# Altium PCB Marcelo-v1.PcbDoc
Units mil, origin at the board's own origin, x right, y up, seen from the top; angles counter-clockwise.
Board outline 433.07 x 434.05 mil, 4 copper layers (Top Layer, Mid-Layer 1, Mid-Layer 2, Bottom Layer); 36 components, 30 nets, 159 pads, 24 vias.
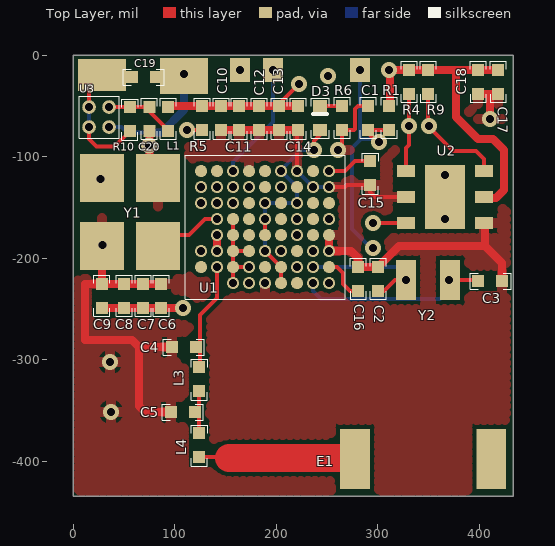
[diagram p0: Top Layer view]
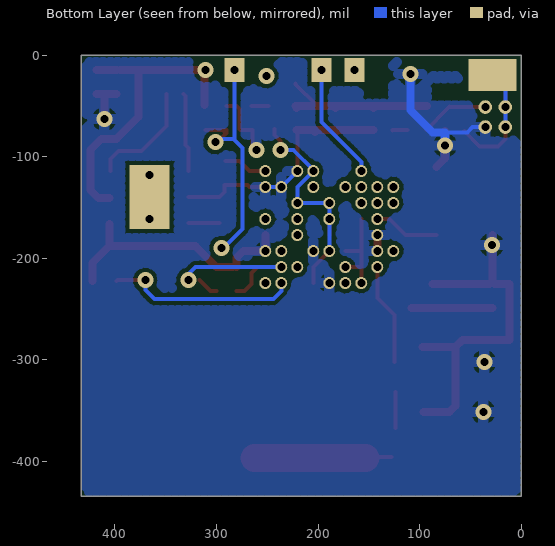
[diagram p1: Bottom Layer view, seen from below]
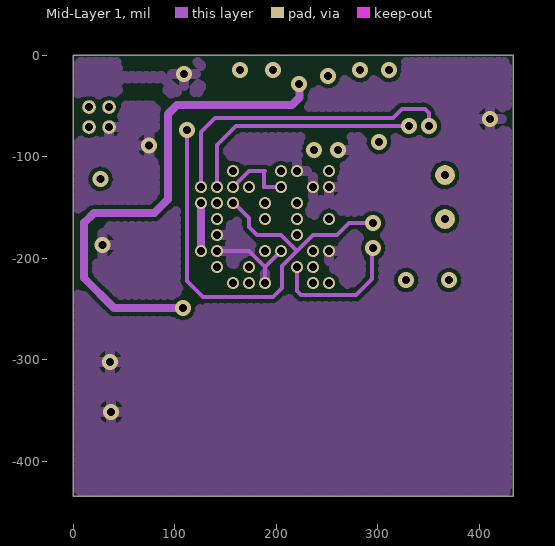
[diagram p2: Mid-Layer 1]
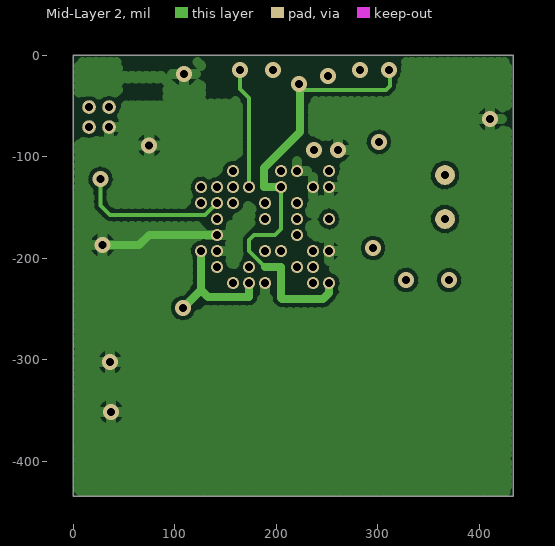
[diagram p3: Mid-Layer 2]

## Layer stack, top to bottom
Top Solder: solder mask 0.4, Solder Resist, Dk 3.5
Top Layer: signal copper 1.4
Dielectric1: prepreg 12.6, FR-4, Dk 4.8
Mid-Layer 1: signal copper 1.4
Dielectric2: core 12.6, FR-4, Dk 4.8
Mid-Layer 2: signal copper 1.4
Dielectric3: prepreg 12.6, FR-4, Dk 4.8
Bottom Layer: signal copper 1.4
Bottom Solder: solder mask 0.4, Solder Resist, Dk 3.5

## Board outline
0,-434.06 433.07,-434.06 433.07,0 0,0

## Design rules (kind name [scope] priority, off if disabled: settings)
Clearance "pour clearance" [(InNet('GND'))] p1: gap=3.94 ignorepadtopadclearanceinfootprint=FALSE except(0: Arc-Hole Track-Hole SMDPad-Hole THPad-Hole Via-Hole Fill-Hole Poly-Hole Region-Hole Text-Hole)
Clearance [All] p2: gap=3 ignorepadtopadclearanceinfootprint=FALSE except(0: Arc-Hole Track-Hole SMDPad-Hole THPad-Hole Via-Hole Fill-Hole Poly-Hole Region-Hole Text-Hole)
ComponentClearance [All] p1: gap=3.94 collisioncheckmode=3 verticalgap=10 showdistances=FALSE
FabricationTestPointUsage TestPointUsage [All] p1: valid=0 allowmultiple=FALSE
FabricationTestpoint Testpoint [All] p1: side=3 testpointundercomponent=TRUE minsize=40 maxsize=100 preferedsize=60 minholesize=0 maxholesize=40 preferedholesize=32 testpointgrid=1 allowsidetop=TRUE allowsidebottom=TRUE usegrid=TRUE gridtolerance=0.01
HoleSize [All] p1: absolutevalues=TRUE maxlimit=100 minlimit=7.87 maxpercent=80.000 minpercent=20.000
HoleToHoleClearance [All] p1: gap=3.94 allowstackedmicrovias=TRUE
MinimumSolderMaskSliver [All] p1: minsoldermaskwidth=0.39
PolygonConnect [All] p1: connectstyle=Relief reliefconductorwidth=10 reliefentries=4 polygonreliefangle="90 Angle" airgapwidth=10
RoutingVias [All] p1: holewidth=11.81 width=19.68 viastyle="Through Hole" minholewidth=11.81 minwidth=19.68 maxholewidth=28 maxwidth=50
ShortCircuit [All] p1: allowed=TRUE
SilkToSilkClearance [All] p1: silktosilkclearance=0
SilkToSolderMaskClearance SilkscreenOverComponentPads [IsPad] p1: minsilkscreentomaskgap=0 clearancetoexposedcopper=TRUE
SolderMaskExpansion [All] p1: expansion=0.39
Width [All] p1: maxlimit=39.37 minlimit=3.94 preferedwidth=3.94
21 further rules are at their usual default settings.

## Components (designator, comment, footprint, x,y, rotation, side; value= is the part's Value field where it differs from the comment)
C1 "100pF" 0201 290.35,-73.82 r90 top
C2 "56pF" 0201 300.2,-232.28 r90 top
C3 "27pF" 0201 398.62,-222.44 r0 top
C4 "0.2pF" 0201 121.06,-287.4 r180 top
C5 "1.5pF" 0201 120.08,-351.38 r180 top
C6 "0,1uF" 0201 86.61,-249.02 r90 top
C7 "0.1uF" 0201 68.9,-249.02 r90 top
C8 "0.1uF" 0201 50.2,-249.02 r90 top
C9 "1 .0uF" 0201 28.5,-249.02 r90 top
C10 "0.1uF" 0201 145.67,-50.2 r270 top
C11 "0.1uF" 0201 163.39,-50.2 r270 top
C12 "1.0uF" 0201 183.07,-50.2 r270 top
C13 "1uF" 0201 202.76,-50.2 r270 top
C14 "0.1uF" 0201 221.45,-50.2 r270 top
C15 "1uF" 0201 292.32,-104.33 r270 top
C16 "1uF" 0201 280.51,-232.28 r90 top
C17 "1uF" 0201 418.31,-38.39 r90 top
C18 "0.1uF" 0201 398.62,-38.39 r90 top
C19 "1 uF" 0201 81.69,-21.65 r180 top
C20 "1 uF" 0201 75.09,-74.82 r90 top
D3 "LED1" 0402 243.11,-73.82 r90 top
E1 "Antenna" ANTENA-YSK 277.56,-397.64 r0 top
L1 "Inductor Iron" 0201 93.5,-74.88 r90 top
L3 "1.8nH" 0201 124.02,-307.09 r270 top
L4 "Inductor" 0201 124.02,-372.05 r270 top
R1 "Res1" 0201 311.02,-73.82 r90 top
R4 "Res1" 0201 330.71,-38.39 r90 top
R5 "Res1" 0201 126.97,-50.2 r270 top
R6 "Res1" 0201 264.76,-73.82 r90 top
R9 "Res1" 0201 349.41,-38.39 r90 top
R10 "Res1" 0201 56,-51.18 r270 top
U1 "CYBL10X6X" WLCSP-68 251.97,-114.17 r270 top
U2 "TMP116" DRV0006A 327.76,-114.17 r0 top locked
U3 "ADP172" ADP172 25.59,-61.02 r0 top
Y1 "FA-20H" FA-20H 28.54,-121.24 r270 top
Y2 "32.768KHz" ABS05 327.76,-221.46 r0 top

## Footprints (in the part's own frame and the unit in brackets; to place one, negate y for a bottom-side part, rotate by r counter-clockwise, add the part's x,y. Pads: shape width x height; smd on the part's side, far side on the other; paste and mask are expansions set on the pad)
0201 [mm]
  rect 0.3x0.3 smd paste+0 mask+0.015: 1(0,0) 2(0.6,0)
  silkscreen extent -0.2,-0.2 0.82,0.2
0402 [mm]
  rect 0.3x0.35 smd paste+0 mask+0.015: 1(0,0) 2(0.6,0)
  silkscreen extent -0.2,-0.23 0.8,0.23
ABS05 [mm] "CRYSTAL"
  rect 0.5x1 smd mask+0.1: 1(0,0) 2(1.102,0)
ADP172 [mm]
  round 0.34 hole 0.2 paste+0.01 mask+0.01: A1(-0.25,0.25) A2(0.25,0.25) B1(-0.25,-0.25) B2(0.25,-0.25)
  silkscreen extent -0.5,-0.53 0.5,0.53
ANTENA-YSK [mm]
  rect 0.74x1.5 smd mask+0.03: 1(0,0) 2(3.406,0)
DRV0006A [mm]
  rect 0.45x0.3 smd paste+0.07 mask+0.07: 1(0,0) 2(0,-0.65) 3(0,-1.3) 4(1.95,-1.3) 5(1.95,-0.65) 6(1.95,0)
  rect 1x1.6 smd: 7(0.975,-0.65)
  rect 1x1.6 smd far side: 7(0.975,-0.65)
  round 0.5 hole 0.2: ""(0.975,-1.2)
  round 0.5 hole 0.2 paste+0 mask+0: ""(0.975,-0.1)
FA-20H [mm] "CRYSTAL"
  rect 1.2x1.1 smd mask+0.05: 1(0,0) 2(1.7,0) 4(0,1.4)
  rect 1.2x1.1 smd paste+0 mask+0.05: 3(1.7,1.4)
WLCSP-68 [mm]
  round 0.3 hole 0.2 paste+0.01 mask+0.01: A1(0,0) A2(0.4,0) A4(1.2,0) A6(2,0) A8(2.8,0) B2(0.4,-0.4) B6(2,-0.4) B7(2.4,-0.4) B8(2.8,-0.4) C1(0,-0.8) C3(0.8,-0.8) C4(1.2,-0.8) C5(1.6,-0.8) C7(2.4,-0.8) D1(0,-1.2) D2(0.4,-1.2) D6(2,-1.2) E3(0.8,-1.6) E4(1.2,-1.6) E6(2,-1.6) E8(2.8,-1.6) F2(0.4,-2) F7(2.4,-2) F8(2.8,-2) G1(0,-2.4) G2(0.4,-2.4) G3(0.8,-2.4) G8(2.8,-2.4) H2(0.4,-2.8) H3(0.8,-2.8) H4(1.2,-2.8) H5(1.6,-2.8) H6(2,-2.8) H7(2.4,-2.8) J2(0.4,-3.2) J3(0.8,-3.2) J6(2,-3.2)
  round 0.3 smd paste+0.01 mask+0.01: A3(0.8,0) A5(1.6,0) A7(2.4,0) B1(0,-0.4) B3(0.8,-0.4) B4(1.2,-0.4) B5(1.6,-0.4) C2(0.4,-0.8) C6(2,-0.8) C8(2.8,-0.8) D3(0.8,-1.2) D4(1.2,-1.2) D5(1.6,-1.2) D7(2.4,-1.2) D8(2.8,-1.2) E1(0,-1.6) E2(0.4,-1.6) E5(1.6,-1.6) E7(2.4,-1.6) F1(0,-2) F3(0.8,-2) F4(1.2,-2) F5(1.6,-2) F6(2,-2) G4(1.2,-2.4) G5(1.6,-2.4) G6(2,-2.4) G7(2.4,-2.4) H1(0,-2.8) J1(0,-3.2) J7(2.4,-3.2)
  silkscreen extent -0.4,-3.6 3.2,0.4

## Free pads (board coordinates)
  rect 47.24x31.5 smd far side: 0(28.54,-19.68)
  rect 47.24x31.5 smd: 0(28.54,-19.69)
  rect 47.24x35.43 smd: 0(109.25,-20.67)
  rect 19.68x23.62 smd: 0(164.37,-14.76) 0(196.85,-14.76) 0(282.48,-14.76)
  rect 19.68x23.62 smd far side: 0(164.37,-14.76) 0(196.85,-14.76) 0(282.48,-14.76)

## Via types
v1: diameter 15.75, hole 7.87, Top Layer to Bottom Layer, 17 vias
v2: diameter 15.75, hole 7.87, Top Layer to Mid-Layer 1, 4 vias
v3: diameter 15.75, hole 7.87, Top Layer to Mid-Layer 2, 3 vias

## Nets (pads, with @x,y where several pads share a name; then routed paths per layer and width w, separated by ;. In a path a pad name is that pad's centre, name@x,y a point inside that pad or via, vN(x,y) a via of type N, cw(c..) or ccw(c..) an arc to the next point about the centre after c; other vN are vias at no path point)
GND: C1.2 C2.2 C3.2 C4.2 C5.2 C6.2 C7.2 C8.2 C9.2 C10.2 C11.2 C12.2 C13.2 C14.2 C15.2 C16.2 C17.1 C18.1 C19.1 C20.1 pad.0@109.25,-20.67 R6.1 U1.A2 U1.A5 U1.A6 U1.B2 U1.C1 U1.D6 U1.E8 U1.F1 U1.H5 U1.H6 U2.2 U2.4 U3.B2 Y1.2 Y1.4 | length 1355.4
  Top Layer w3.94: U1.C1 C14.2@220.47,-74.8 ; U1.A2 267.72,-129.92 269.68,-127.95 C15.2 292.32,-134.84 297.24,-139.76 U2.2 ; v1(260.83,-93.5) 264.76,-89.57 R6.1 276.57,-73.82 277.56,-72.83 277.56,-53.15 280.51,-50.2 C1.2
  Top Layer w7.87: C9.2@26.5,-225.39 11.73,-225.39 11.73,-280.4 57.96,-280.4 64.96,-287.4 ; C9.2@28.54,-222.44 Y1.2 Y1.2@28.54,-177.16 ; C9.2@31.5,-225.39 C6.2 C6.2@87.6,-225.39 ; C20.1 75.09,-101.66 Y1.4@83.66,-110.24 ; C5.2 70.87,-351.38 64.96,-345.47 64.96,-287.4 ; C4.2 64.96,-287.4 ; U1.H6 U1.H5 ; C10.2 C12.2 C12.2@185.04,-73.82 ; C12.2@183.07,-75.79 C12.2@185.04,-73.82 ; C13.2@202.96,-75.77 C13.2@201.01,-73.82 ; C14.2 C13.2 C13.2@201.01,-73.82 ; U1.A5 U1.A6 273.62,-192.91 280.51,-199.8 C16.2 ; C16.2@284.45,-208.66 C2.2 320.87,-187.99 405.51,-187.99 ; C18.1 410.45,-38.39 ; U2.4@405.51,-166.34 405.51,-187.99 ; v1(410.43,-62.99) 410.43,-39.35 ; 411.42,-39.35 410.45,-38.39 ; C17.1 410.45,-38.39 ; C3.2 422.24,-204.72 405.51,-187.99 ; C12.2@185.04,-73.82 C13.2@201.01,-73.82
  Mid-Layer 1 w3.94: U1.H6 173.23,-192.91 188.98,-208.66 ; U1.E8 188.98,-208.66 ; U1.D6 188.98,-208.66
  Mid-Layer 2 w7.87: v1(29,-187) 64.92,-187.08 75.03,-177.02 U1.H5
  Bottom Layer w3.94: U3.B2 47.87,-70.87 53,-76 75,-76 ; U1.C1 U1.B2 U1.A2
  Bottom Layer w7.87: v1(75,-89) 75,-76 87.39,-76 109.25,-54.13 v1(109.25,-18.7) v1@109.25,-17.72
  other v1: 37.4,-351.38 36.42,-302.17
NetC2_1: C2.1 U1.B7 Y2.1 | length 122.5
  Top Layer w3.94: C2.1 306.1,-232.28 316.93,-221.46
  Bottom Layer w3.94: U1.B7 320.87,-208.66 327.76,-215.55 v1(327.76,-221.46) v1@327.76,-222.44
NetC3_1: C3.1 U1.B8 Y2.2 | length 185.4
  Top Layer w3.94: Y2.2 397.64,-221.46 C3.1
  Bottom Layer w3.94: U1.B8 236.22,-232.28 244.09,-240.16 351.38,-240.16 ; 352.36,-240.16 361.22,-240.16 370.08,-231.3 v1(370.08,-221.46)
NetC4_1: C4.1 L3.1 U1.H7 | length 100.4
  Top Layer w3.94: L3.1@125,-302.17 125,-287.4 125,-255.91 141.73,-239.17 U1.H7
NetC5_1: C5.1 L3.2 L4.1 | length 35.4
  Top Layer w3.94: L4.1@124.02,-367.13 124.02,-351.38 L3.2@124.02,-331.69
NetC20_2: C20.2 L1.1 R10.1 U3.A2 | length 67.7
  Top Layer w3.94: U3.A2 R10.1 69.8,-51.18 70.45,-50.83 72.95,-53.33 L1.1@93.5,-73.88
NetD3_2: D3.2 R6.2 | length 16.7
  Top Layer w3.94: D3.2@249.02,-50.2 R6.2 R6.2@265.75,-50.2
NetE1_1: E1.1 L4.2 | length 132.9
  Top Layer w3.94: L4.2@127.95,-395.67 151.57,-395.67
  Top Layer w27.56: 153.54,-396.65 262.8,-396.65
NetU1_F6: U1.F6 U1.F7 U1.G4 U1.G5 U1.G6 U1.G7 U1.G8 | length 94.5
  Top Layer w3.94: U1.G8 U1.G7 ; U1.G4 U1.G5 U1.G6 ; U1.F7 U1.G7 ; U1.F6 U1.G6 ; U1.G7 U1.G6
NetU1_H3: U1.H3 Y1.1 | length 149.1
  Mid-Layer 2 w3.94: v3(27,-122) 27,-148 36.48,-157.48 129.92,-157.48 U1.H3@140.75,-146.65 ; U1.H3@141.73,-146.65 U1.H3
NetU1_H4: U1.H4 Y1.3 | length 64.6
  Top Layer w3.94: Y1.3@83.66,-177.16 114.17,-177.16 129.92,-161.42 U1.H4
P0.0: R9.1 U1.J2 U2.6 | length 415.2
  Top Layer w3.94: R9.1 349.41,-69.88 349.9,-70.37 374.02,-94.49 396.65,-94.49 404.53,-102.36 U2.6
  Mid-Layer 1 w3.94: U1.J2 125.98,-75.79 139.76,-62.01 314.96,-62.01 323.82,-53.15 346.46,-53.15 350.39,-57.09 v2(350.39,-69.88) v2@350.39,-70.87
P0.1: R4.1 U1.H2 U2.1 | length 317.9
  Top Layer w3.94: U2.1 327.76,-91.54 330.71,-88.58 v2(330.71,-69.88) 330.71,-40.35 331.69,-39.37 R4.1@332.68,-38.39
  Mid-Layer 1 w3.94: U1.H2@141.73,-130.91 U1.H2 141.73,-88.58 160.43,-69.88 v2(330.71,-69.88) v2@331.69,-69.88
P0.2: R5.2 U1.G3 U2.3 | length 514.6
  Top Layer w3.94: v2(112.21,-73.82) R5.2 R5.2@126.64,-74.14 ; v2@297.24,-165.35 U2.3
  Mid-Layer 1 w3.94: v2(112.21,-73.82) 112.2,-222.44 127.95,-238.19 196.85,-238.19 205.71,-229.33 205.71,-207.68 220.47,-192.91 ; U1.G3 158.46,-145.67 173.23,-160.43 173.23,-169.29 181.1,-177.17 204.72,-177.17 220.47,-192.91 ; v2(295.28,-165.35) 271.65,-165.35 259.84,-177.17 236.22,-177.17 220.47,-192.91
P0.6: pad.0@196.85,-14.76 U1.G1 | length 114.7
  Bottom Layer w3.94: U1.G1 157.48,-105.31 196.85,-65.94 pad.0@196.85,-15.75
  other v1: 196.85,-14.76
P0.7: pad.0@164.37,-14.76 U1.F2 | length 118.8
  Mid-Layer 2 w3.94: v1(164.37,-14.76) 164.37,-33.46 173.23,-42.32 U1.F2
P2.6: D3.1 U1.C3 U1.D1 U1.D7 U1.D8 U1.E3 U1.E4 U1.E5 U1.E6 | length 235.2
  Top Layer w3.94: U1.E6 U1.D7 U1.D8 ; U1.E5 U1.E4 ; v1(237.2,-93.5) 237.2,-84.65 243.11,-78.74 D3.1 D3.1@243.11,-72.83
  Bottom Layer w3.94: U1.E6 U1.E4 U1.E3 U1.C3 220.47,-129.92 U1.D1 204.72,-113.22 224.44,-93.5 v1(237.2,-93.5)
P2.7: U1.B3
P3.0: U1.C4
P3.1: U1.C5
P3.4: U1.B4
P3.5: U1.B5
P3.6: U1.B6 | length 1
  Mid-Layer 1 w3.94: U1.B6 U1.B6@236.22,-191.96
P3.7: U1.A4 | length 1.4
  Top Layer w3.94: U1.A4 U1.A4@252.95,-162.4
P5.0: U1.C8
VBAT: C19.2 pad.0@28.54,-19.68 pad.0@28.54,-19.69 R10.2 U3.A1 U3.B1 | length 155.6
  Top Layer w3.94: U3.B1 15.75,-82.75 23,-90 41,-90 R10.2@56,-75 ; U3.A1@15.75,-52.17 U3.A1 15.75,-32.48 pad.0@28.54,-19.68
  Bottom Layer w3.94: U3.B1 U3.A1 15.75,-32.48 pad.0@28.54,-19.68
VCCD: C16.1 U1.A7 | length 44.7
  Top Layer w3.94: U1.A7 259.84,-208.66 265.75,-214.57 265.75,-225.39 272.64,-232.28 C16.1
VDD: C6.1 C7.1 C8.1 C9.1 C10.1 C11.1 C12.1 C13.1 C14.1 C17.2 C18.2 L1.2 R1.2 R4.2 R5.1 R9.2 U1.A8 U1.D2 U1.F8 U1.G2 U1.J3 U1.J6 U2.5 | length 1743.1
  Top Layer w3.94: C13.1@200.79,-50.2 201.77,-49.21 222.11,-28.88 222.11,-28.54 222.11,-27.99 222.46,-28.34 v3(222.45,-28.54)
  Top Layer w7.87: C9.1 C8.1 C7.1 C6.1 v3(108.27,-249.02) ; L1.2@93,-50 93.51,-50 125.98,-50.2 R5.1 C10.1 C10.1@147.64,-50.2 ; 106.3,-50.2 107.28,-50.2 ; C10.1@145.67,-52.16 146.65,-51.18 C10.1@147.64,-50.2 ; C12.1@182.09,-51.18 C12.1@183.07,-52.16 ; C14.1@222.44,-50.2 C14.1 C13.1 200.79,-50.2 C12.1 C11.1 C10.1@147.64,-50.2 ; R1.2@312.01,-49.21 312.01,-14.76 R4.2 R9.2 376.99,-14.76 ; C18.2@394.68,-14.76 376.99,-14.76 ; C18.2 C17.2 ; U2.5@405.51,-140.75 416.34,-140.75 424.21,-132.87 424.21,-93.5 413.39,-82.68 398.62,-82.68 376.99,-61.04 376.99,-14.76
  Mid-Layer 1 w3.94: U1.G2 173.23,-114.17 188.98,-114.17 187.99,-115.16 187.99,-129.92 U1.D2
  Mid-Layer 1 w7.87: v3(108.27,-249.02) 40.35,-249.02 11,-219.66 11,-165 20.52,-155.48 80,-155.48 93.5,-141.98 93.5,-58.07 102.36,-49.21 215.55,-49.21 222.94,-41.83 222.94,-29.03 v3@223.43,-28.54 ; U1.J6 U1.J3
  Mid-Layer 2 w3.94: U1.F8@173.23,-225.36 U1.F8 ; 188.98,-208.66 173.23,-192.91 173.23,-182.09 178.15,-177.17 198.82,-177.17 204.72,-171.26 U1.D2 ; v3(222.45,-28.54) 223.43,-29.52 223.43,-34.45 308.07,-34.45 312.01,-30.51 v1@312.01,-14.76
  Mid-Layer 2 w7.87: v3(108.27,-249.02) 125.98,-231.3 ; U1.J6 125.98,-231.3 ; U1.F8 173.23,-238.19 132.87,-238.19 125.98,-231.3 ; 188.98,-208.66 204.72,-208.66 204.72,-239.17 205.71,-240.16 246.06,-240.16 251.97,-234.25 U1.A8 ; U1.D2 187.99,-129.92 187.99,-111.22 223.43,-75.79 v3@223.43,-34.45
  other v1: 311.02,-14.76
VREF: C15.1 U1.A1 | length 43.4
  Top Layer w3.94: U1.A1 267.71,-114.17 277.55,-104.33 C15.1@291.34,-104.33
XRES: C1.1 pad.0@282.48,-14.76 R1.1 U1.C7 | length 378.3
  Top Layer w3.94: C1.1@292.32,-75.79 C1.1 ; v1@296.27,-81.7 295.31,-81.7 290.35,-76.74 C1.1 ; R1.1 C1.1
  Mid-Layer 1 w3.94: U1.C7 220.47,-232.28 224.41,-236.22 278.54,-236.22 294.29,-220.47 294.29,-189.96 v1@294.29,-187.99
  Bottom Layer w3.94: v1(282.48,-14.76) 282.48,-83.66 274.61,-91.54 274.61,-171.26 293.31,-189.96 v1(295.28,-189.96) ; 283.46,-82.68 v1@301.18,-82.68
  other v1: 301.18,-85.63
pads on no net: E1.2 U1.A3 U1.B1 U1.C2 U1.C6 U1.D3 U1.D4 U1.D5 U1.E1 U1.E2 U1.E7 U1.F3 U1.F4 U1.F5 U1.H1 U1.J1 U1.J7 U2. U2.7
copper on no net:
  other v1: 250.98,-20.67

## Polygon pours and split planes (outlines as drawn)
GND on Top Layer "Top Layer-No Net" (hatched 45Degree grid 5 track 10, remove dead copper, pour order 1000): 5,-430 426,-430 426,-8 7,-8 5,-10 5,-430
GND on Mid-Layer 1 "Top Layer-No Net" (hatched 45Degree grid 5 track 10, remove dead copper, pour order 1001): 5,-430 427,-430 427,-7 5,-7
GND on Mid-Layer 2 "Top Layer-No Net" (hatched 45Degree grid 5 track 10, remove dead copper, pour order 1002): 5,-430 427,-430 427,-7 6,-7
GND on Bottom Layer "Top Layer-No Net" (hatched 45Degree grid 5 track 10, remove dead copper, pour order 1003): 5,-430 428,-430 428,-7 5,-7

## Silkscreen, mask and mechanical layers (free items; w line width, h text height)
Top Overlay:
  lines w3.94: 236.22,-58.07 250,-58.07
Mechanical 1:
  the board outline again, w3.94